# Altium PCB PCB1_usb.PcbDoc
Units mil, origin at the board's own origin, x right, y up, seen from the top; angles counter-clockwise.
Board outline 2150 x 1050 mil, 2 copper layers (Top Layer, Bottom Layer); 18 components, 9 nets, 52 pads, 4 vias.
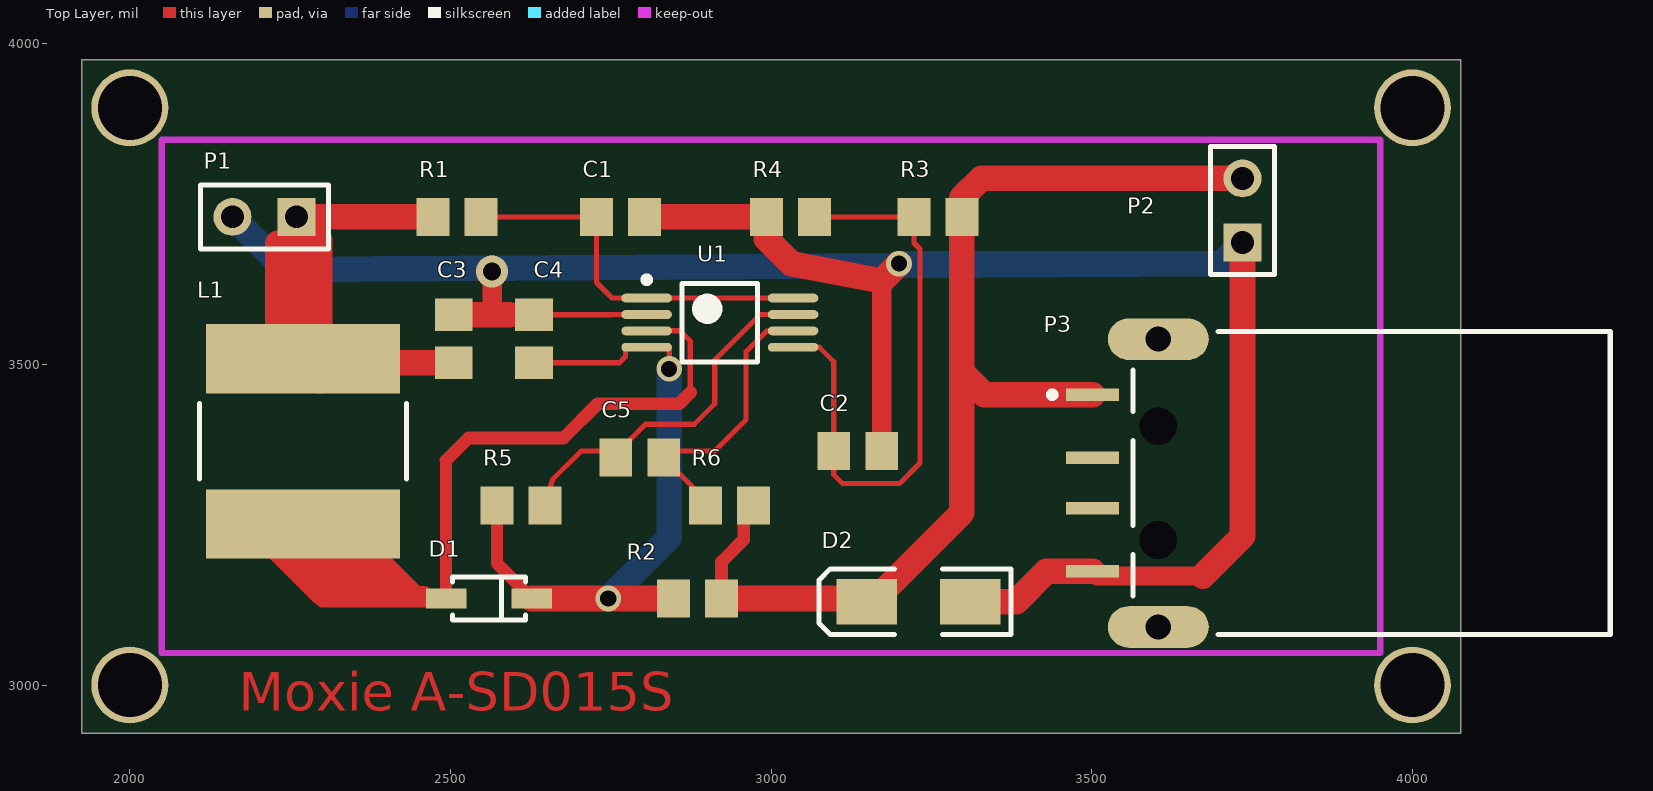
[diagram p0: Top Layer view]
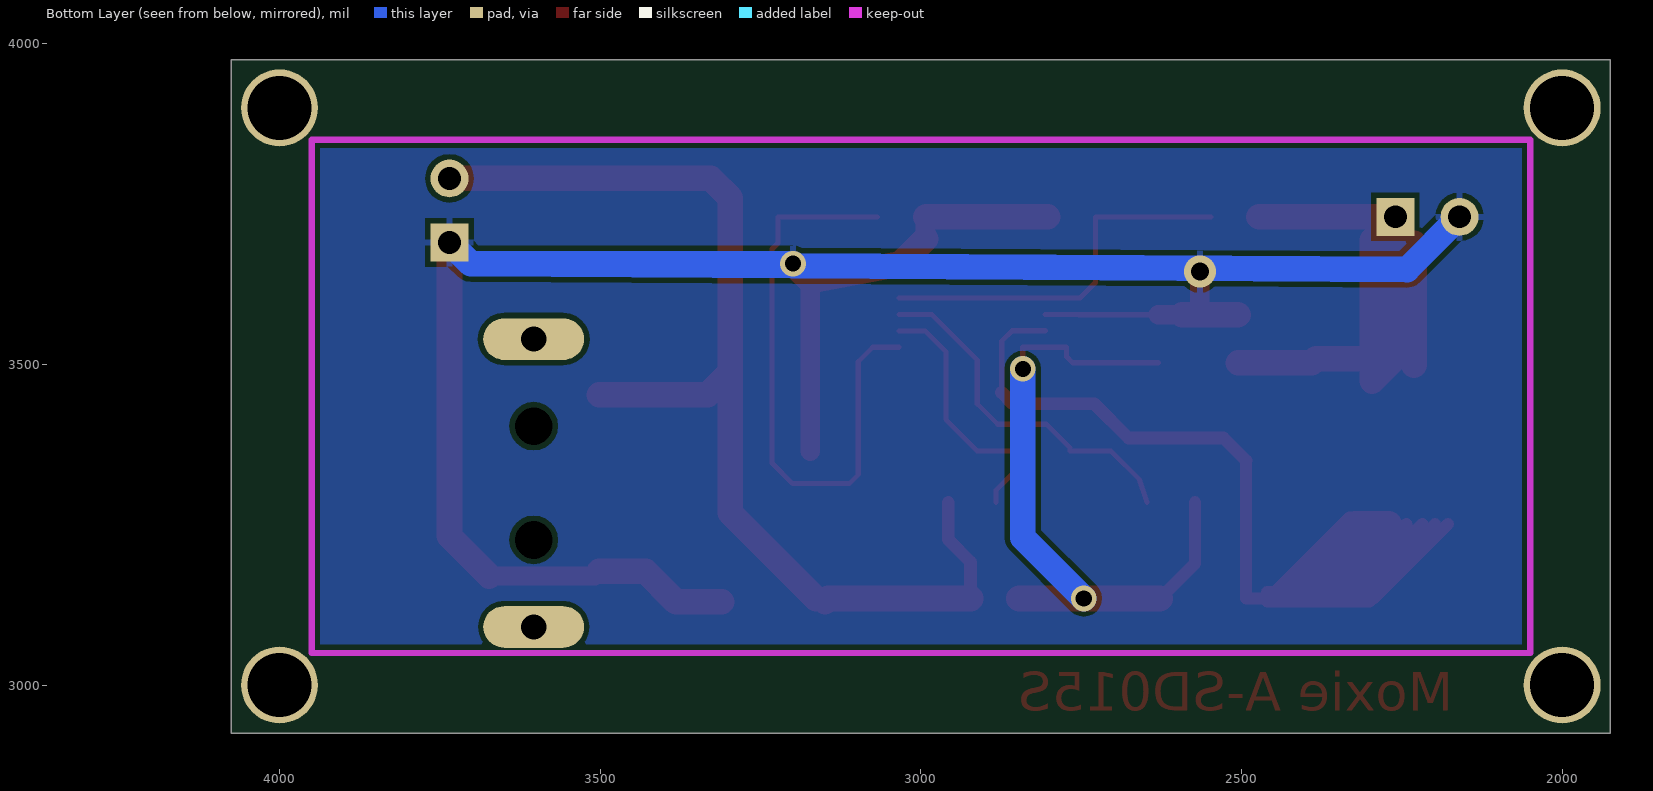
[diagram p1: Bottom Layer view, seen from below]

## Layer stack, top to bottom
Top Layer: signal copper 1.4
Dielectric: dielectric 12.6, FR-4, Dk 4.8
Bottom Layer: signal copper 1.4

## Board outline
1925,3975 4075,3975 4075,2925 1925,2925

## Design rules (kind name [scope] priority, off if disabled: settings)
Clearance [All] p1: gap=8
PolygonConnect [All] p1: connectstyle=Relief reliefconductorwidth=10 reliefentries=4 polygonreliefangle="90 Angle"
RoomDefinition Sheet2_usb [InComponentClass('Sheet2_usb')] p1: confinementstyle=ConfineIn formatcopy=TRUE lockcomponents=FALSE outline 4230,3055 6685,3055 6685,4575 4230,4575
RoutingVias [All] p1: holewidth=25 width=40 viastyle="Through Hole" minholewidth=28 minwidth=50 maxholewidth=28 maxwidth=50
SMDNeckDown [All] p1: percent=60.000
SilkscreenOverComponentPads [All] p1: minsilkscreentomaskgap=10
SolderMaskExpansion [All] p1: expansion=4
Width Width_1 [(InNet('BATT+') OR InNet('GND') OR InNet('NetC4_1') OR InNet('NetD1_1') OR InNet('PV+'))] p1: maxlimit=50 minlimit=20 preferedwidth=40
Width [All] p2: maxlimit=8 minlimit=8 preferedwidth=8
27 further rules are at their usual default settings.

## Components (designator, comment, footprint, x,y, rotation, side; value= is the part's Value field where it differs from the comment)
C1 "Cap Pol3" 2012[0805] 2765,3730 r0 top
C2 "Cap Pol3" 2012[0805] 3135,3365 r0 top
C3 "Cap Pol3" 2012[0805] 2505,3540 r90 top
C4 "Cap Pol3" 2012[0805] 2630,3540 r90 top
C5 "Cap Pol3" 2012[0805] 2795,3355 r0 top
D1 "D Schottky" SOD123 2560,3135 r0 top
D2 "D Zener" DSO-C2/X1.8 3230,3130 r180 top
L1 "Inductor" INDP8181X30N 2270,3380 r270 top
P1 "Header 2" HDR1X2 2260,3730 r180 top
P2 "Header 2" HDR1X2 3735,3690 r90 top
P3 "1470695-4" 1470695A 3710,3315 r0 top
R1 "Res3" 2012[0805] 2510,3730 r0 top
R2 "Res3" 2012[0805] 2885,3135 r180 top
R3 "Res3" 2012[0805] 3260,3730 r180 top
R4 "Res3" 2012[0805] 3030,3730 r180 top
R5 "Res3" 2012[0805] 2610,3280 r0 top
R6 "Res3" 2012[0805] 2935,3280 r180 top
U1 "SPV1040" TSOP65P640-8AM 2920,3565 r0 top

## Footprints (in the part's own frame and the unit in brackets; to place one, negate y for a bottom-side part, rotate by r counter-clockwise, add the part's x,y. Pads: shape width x height; smd on the part's side, far side on the other; paste and mask are expansions set on the pad)
2012[0805] [mm] "Chip Resistor; Body 2.0 x 1.3 mm (LxW typ)"
  rect 1.3x1.5 smd: 1(-0.95,0) 2(0.95,0)
1470695A [mm] "Connector; USB1.1, Type A, SM; 4 Position; Right Angle"
  rect 2.1x0.5 smd: 1(-5.3,3.5) 2(-5.3,1) 3(-5.3,-1) 4(-5.3,-3.5)
  oval 4x1.65 hole 1: 5(-2.7,-5.7) 6(-2.7,5.7)
  round 1.2 hole 1.5 unplated: MH1(-2.7,-2.25) MH2(-2.7,2.25)
  silkscreen extent -7.02,-6 15.2,6
DSO-C2/X1.8 [mm] "DO-214-AC/SMA; 2 C-Bend Leads; Body 5 x 2.7 mm, inc. leads (LxW)"
  rect 2.4x1.8 smd: 1(-2.05,0) 2(2.05,0)
  silkscreen extent -3.65,-1.3 3.95,1.3
HDR1X2 [mm] "Connector; Header; 2 Position"
  rect 1.5x1.5 hole 0.9: 1(0,0)
  round 1.5 hole 0.9: 2(2.54,0)
  silkscreen extent -1.27,-1.27 3.81,1.27
INDP8181X30N [mm] "Precision Wire Wound Inductor, 2-Leads, Body 8.1x8.1mm, IPC Medium Density"
  rect 2.75x7.7 smd: 1(-3.275,0) 2(3.275,0)
  silkscreen extent -1.5,-4.1 1.5,4.1, body extent -4.1,-4.1 4.1,4.1, height 3
SOD123 [mm] "SOD-123; 2 Leads; Body 2.7 x 1.6 mm, (LxW)"
  rect 1.6x0.8 smd: 1(-1.7,0) 2(1.7,0)
  silkscreen extent -1.45,-0.85 1.45,0.85
TSOP65P640-8AM [mm] "TSOP, 8-Leads, Body 3x4.4mm, Pitch 0.65mm, IPC Low Density"
  oval 2x0.35 smd: 1(-2.9,0.975) 2(-2.9,0.325) 3(-2.9,-0.325) 4(-2.9,-0.975) 5(2.9,-0.975) 6(2.9,-0.325) 7(2.9,0.325) 8(2.9,0.975)
  silkscreen extent -3.02,-1.55 1.5,1.82, body extent -2.25,-1.55 2.25,1.55, height 1.1

## Part data
C1 C2 C3 C4 C5: "Polarized Capacitor (Surface Mount)"
D1: "Schottky Diode"
D2: "Zener Diode"
P1 P2: "Header, 2-Pin"
P3: "USB 1.1, Right Angle, SMT, A Type, Plug, 4 Position, Black"
R1 R2 R3 R4 R5 R6: "Resistor"
U1: library part Component_1, "MPPT DC DC switcher"

## Free pads (board coordinates)
  round 120 hole 100: 0(2000,3900) 1(2000,3000) 2(4000,3000) 3(4000,3900)

## Via types
v1: diameter 40, hole 25, Top Layer to Bottom Layer, 3 vias
v2: diameter 50, hole 28, Top Layer to Bottom Layer, 1 vias

## Nets (pads, with @x,y where several pads share a name; then routed paths per layer and width w, separated by ;. In a path a pad name is that pad's centre, name@x,y a point inside that pad or via, vN(x,y) a via of type N, cw(c..) or ccw(c..) an arc to the next point about the centre after c; other vN are vias at no path point)
BATT+: D2.2 P2.2 P3.1 R2.1 R3.1 R6.1 | length 1983.9
  Top Layer w20: R2.1 2922.4,3192 2957.4,3227 R6.1@2957.4,3285
  Top Layer w30.71: R2.1 D2.2@3164,3135
  Top Layer w40: R2.1 3144.29,3135 D2.2 ; D2.2@3164,3135 3297.4,3268.4 3297.4,3488 ; P3.1 3332.61,3452.8 3297.4,3488 ; P2.2 3327.4,3790 3297.4,3760 R3.1 3297.4,3488
GND: C1.2 C2.2 C3.2 C4.2 D2.1 P1.2 P2.1 P3.4 R4.2 U1.2 | length 4160.3
  Top Layer w8.27: C4.2 2754.32,3577.4 2754.72,3577.8 U1.2
  Top Layer w30: P3.4 3508.54,3170 3673,3170
  Top Layer w30.71: 2565,3577.4 v2@2565,3655 ; 2592,3577.4 C4.2 ; 2992.6,3696 R4.2 ; C2.2 3172.4,3630
  Top Layer w40: C3.2 2592,3577.4 ; C1.2 R4.2 ; 2992.6,3696 3031.6,3657 3172.4,3630 v1(3199.4,3657) ; D2.1 3382,3130 3429.2,3177.2 P3.4 ; 3673,3170 3735,3232 P2.1
  Bottom Layer w40: P1.2 2242,3648 3199.42,3653.9 3702,3657 ; v1(3199.4,3657) 3702,3657 ; P2.1 3702,3657
  other v2: 2565,3645
NetC1_1: C1.1 R1.2 U1.1 U1.8 | length 599.1
  Top Layer w8: R1.2 C1.1 2727.6,3627.79 2752,3603.39 U1.1 U1.8
NetC2_1: C2.1 R3.2 R4.1 U1.5 | length 945.3
  Top Layer w8: U1.5 3074.98,3526.61 3097.6,3504 C2.1 3097.6,3328 3111.6,3314 3200,3314 3232,3346 3232,3680 3222.6,3689.4 R3.2 R4.1
NetC4_1: C4.1 D1.2 R2.2 R5.1 U1.4 | length 1053.6
  Top Layer w8.27: C4.1 2763.6,3502.6 2773,3512 2773,3526.61 U1.4 2841,3526.61 v1(2841,3493)
  Top Layer w18.9: R5.1@2572.6,3285 2572.6,3189.33 D1.2
  Top Layer w40: D1.2 v1(2746,3135) R2.2
  Bottom Layer w40: v1(2746,3135) 2841,3230 v1(2841,3493)
NetC5_1: C5.1 R5.2 U1.7 | length 562
  Top Layer w8: R5.2@2647.4,3285 2658.81,3320 2703.81,3365 2767.6,3365 2767.6,3370.13 2804,3406.53 2880,3406.53 2912,3438.53 2912,3506.8 2983,3577.8 U1.7
NetC5_2: C5.2 R6.2 U1.6 | length 428.1
  Top Layer w8: R6.2@2882.6,3285 2882.6,3304 2842.4,3344.2 2842.4,3365 2912,3365 2961,3414 2961,3520 2993.2,3552.2 U1.6
NetD1_1: D1.1 L1.2 U1.3 | length 2707.6
  Top Layer w8.27: U1.3 2857.8,3552.2 2874,3536 2874,3456
  Top Layer w18.9: L1.2@2178,3251.06 2294.06,3135 ; L1.2@2198,3251.06 2314.06,3135 ; L1.2@2218,3251.06 2334.06,3135 ; L1.2@2243,3251.06 2359.06,3135 ; L1.2@2263,3251.06 2379.06,3135 ; L1.2@2288,3246.06 2404.06,3130 ; 2293.94,3136.06 2300,3130 2460,3130 ; 2300,3145 2460,3145 ; L1.2@2308,3246.06 2424.06,3130 ; L1.2@2323,3251.06 2439.06,3135 D1.1@2493,3135 ; L1.2@2332.06,3261.06 2448.13,3145 ; 2493,3350 D1.1@2493,3135 ; D1.1 D1.1@2493,3135
  Top Layer w20: 2493,3350 2528,3385 2676,3385 2729.53,3438.53 2856.53,3438.53 2874,3456
  Top Layer w40: L1.2 L1.2@2323,3251.06
PV+: C3.1 L1.1 P1.1 R1.1 | length 1157.7
  Top Layer w40: L1.1@2231,3498.99 2231,3689 ; P1.1@2256,3704 2256,3513.99 2296,3473.99 2296,3694 P1.1 R1.1 ; L1.1 2384,3508.94 2390.34,3502.6 C3.1
pads on no net: P3.2 P3.3 P3.5 P3.6 P3.MH1 P3.MH2

## Polygon pours and split planes (outlines as drawn)
GND on Bottom Layer "Top Overlay-No Net" (solid, pour order 2): 2050,3850 3950,3850 3950,3050 2050,3050

## Keep-outs
Keep-Out Layer:
  lines w10: 2050,3050 2050,3850 3950,3850 3950,3050 2050,3050

## Other copper
Top Layer:
  text "Moxie A-SD015S" at 2170,2960 h60

## Silkscreen, mask and mechanical layers (free items; w line width, h text height)
Drill Drawing:
  text ".LEGEND" at 4200,3200 h60
  text "Drill Drawing." at 4200,3100 h60

## Dimensions
2050,3050 to 2050,3850 on Mechanical 1
2050,3050 to 3950,3050 on Mechanical 1

## Text inside footprints (layer, text, board x,y; h text height)
P3: Mechanical 1 "PCB Edge" at 3728.61,3111.35 h9.84 r90; Mechanical 1 "Alert PCB fab to slot details" at 3670.63,3636.89 h11.81; Mechanical 1 "Slot 1x2.5mm, PTH" at 3670.63,3617.21 h11.81; Mechanical 1 "Assign keep-out area to slot" at 3670.63,3656.58 h11.81; Mechanical 1 "Mech 1 - Slot cut-out" at 3670.63,3597.52 h11.81; Mechanical 1 "Mech 2 - Clearance, move to internal plane if present" at 3670.63,3577.84 h11.81